# EAGLE board seamonster_smd_draft1 (EAGLE 8.2.1)

Size 172.5 x 106.5 mm. Coordinates in mm from the lower left corner, seen from the top.
Outline: 0,0 172.5,0 172.5,106.5 0,106.5 0,0
Copper layers (1*16): Top 0.035mm / dielectric 1.5mm / Bottom 0.035mm
Design rules "default": minimum track width 6mil, minimum drill 0.35mm, track to track 6mil, track to pad 6mil, pad to pad 6mil, via to via 6mil, smd to smd 6mil, copper to edge 40mil, drill to drill 6mil, minimum pad ring 10mil, minimum via ring 8mil, stop-mask expansion 4mil, vias tented up to drill 0mil, thermal gap 10mil

## Footprints (pad centres in the part's own frame; a part is rotated, then mirrored left to right if it is on the bottom)
WQP-PJ301M-12_JACK = drill 1.1: P$1_TIP 0,5; P$2_SWITCH 0,-3.5; P$3_SLEEVE 0,-6.5
CPOL-RADIAL-10UF-25V = drill 0.7 pad 1.651 square: 1 1.27,0 | drill 0.7 pad 1.651: 2 -1.27,0
0805 = smd 0.8 x 1.2: 1 -0.9,0; 2 0.9,0
TO220H = drill 1.118 long: 1 -2.54,-10.16; 2 0,-10.16; 3 2.54,-10.16 | hole 3.302: 0,4.826
SO16 = smd 0.66 x 2.032: 1 -4.445,-3.073; 2 -3.175,-3.073; 3 -1.905,-3.073; 4 -0.635,-3.073; 5 0.635,-3.073; 6 1.905,-3.073; 7 3.175,-3.073; 8 4.445,-3.073; 9 4.445,3.073; 10 3.175,3.073; 11 1.905,3.073; 12 0.635,3.073; 13 -0.635,3.073; 14 -1.905,3.073; 15 -3.175,3.073; 16 -4.445,3.073
SO14 = smd 0.66 x 2.032: 1 -3.81,-3.073; 2 -2.54,-3.073; 3 -1.27,-3.073; 4 0,-3.073; 5 1.27,-3.073; 6 2.54,-3.073; 7 3.81,-3.073; 8 3.81,3.073; 9 2.54,3.073; 10 1.27,3.073; 11 0,3.073; 12 -1.27,3.073; 13 -2.54,3.073; 14 -3.81,3.073
LED3MM = drill 0.813 pad 1.88: A -1.27,0; K 1.27,0
SO14' = smd 0.6 x 2.2: 1 -3.81,-2.6; 2 -2.54,-2.6; 3 -1.27,-2.6; 4 0,-2.6; 5 1.27,-2.6; 6 2.54,-2.6; 7 3.81,-2.6; 8 3.81,2.6; 9 2.54,2.6; 10 1.27,2.6; 11 0,2.6; 12 -1.27,2.6; 13 -2.54,2.6; 14 -3.81,2.6
COMBO_POWER = drill 1.016 pad 1.93: +5V-DOTCOM 1.27,-3.493; COM-DOTCOM -1.27,-3.493; KEY-DOTCOM 3.81,-3.493; NA-DOTCOM -6.35,-3.493; V+DOTCOM 6.35,-3.493; V-DOTCOM -3.81,-3.493 | drill 1.016 pad 1.88 octagon: COM-EURO1 -2.54,-1.27; COM-EURO2 -2.54,1.27; COM-EURO3 0,-1.27; COM-EURO4 0,1.27; COM-EURO5 2.54,-1.27; COM-EURO6 2.54,1.27; V+EURO1 5.08,-1.27; V+EURO2 5.08,1.27; V-EURO1 -5.08,-1.27; V-EURO2 -5.08,1.27 | drill 1.7 pad 2.54: COM-MOTM1 1.98,3.493; COM_MOTM2 -1.98,3.493; V+MOTM 5.94,3.493; V-MOTM -5.94,3.493
M9040P = drill 2.2: 1 0,4.699 | drill 2.2 pad 3: 2 0,0; 3 0,-4.699
9MM_SNAP-IN_POT = drill 1.1 square: 1 -2.5,-7 | drill 1.1 octagon: 2 0,-7; 3 2.5,-7 | drill 2.1 square: CHASSIS1 -4.5,0; CHASSIS2 4.5,0

## Placement (x,y rotation side)
A  THONKICONNNEW  [WQP-PJ301M-12_JACK]  -57.15,-3.38 180 top  (outside the outline)
B  THONKICONNNEW  [WQP-PJ301M-12_JACK]  -68.58,-3.38 180 top  (outside the outline)
C  THONKICONNNEW  [WQP-PJ301M-12_JACK]  -80.01,-3.38 180 top  (outside the outline)
C1  47µF  [CPOL-RADIAL-10UF-25V]  -78.74,72.82 0 top  (outside the outline)
C2  47µF  [CPOL-RADIAL-10UF-25V]  -85.09,72.82 0 top  (outside the outline)
C3  0.1µF  [0805]  -15.24,88.06 0 top  (outside the outline)
C4  0.1µF  [0805]  -19.05,88.06 0 top  (outside the outline)
C5  0.1µF  [0805]  -22.86,88.06 0 top  (outside the outline)
C6  0.1µF  [0805]  -26.67,88.06 0 top  (outside the outline)
CCO1_OUT  THONKICONNNEW  [WQP-PJ301M-12_JACK]  7.62,9.32 180 top
CCO2_OUT  THONKICONNNEW  [WQP-PJ301M-12_JACK]  17.78,9.32 180 top
CCO3_OUT  THONKICONNNEW  [WQP-PJ301M-12_JACK]  27.94,9.32 180 top
CCO4_OUT  THONKICONNNEW  [WQP-PJ301M-12_JACK]  38.1,9.32 180 top
COMPLEX_OUT1  THONKICONNNEW  [WQP-PJ301M-12_JACK]  68.58,9.32 180 top
COMPLEX_OUT2  THONKICONNNEW  [WQP-PJ301M-12_JACK]  78.74,9.32 180 top
IC1  7805T  [TO220H]  -21.59,1.7 0 top  (outside the outline)
IC2  4051D  [SO16]  -30.48,72.82 0 top  (outside the outline)
IC3  4051D  [SO16]  -43.18,72.82 0 top  (outside the outline)
IC4  DG408DY  [SO16]  -55.88,72.82 0 top  (outside the outline)
IC5  4040D  [SO16]  -68.58,72.82 0 top  (outside the outline)
IC6  40106D  [SO14]  -100.33,-11 0 top  (outside the outline)
IC7  4070D  [SO14]  -111.76,-11 0 top  (outside the outline)
LED1  [LED3MM]  10.16,82.98 0 top
LED2  [LED3MM]  29.21,82.98 0 top
LED3  [LED3MM]  48.26,82.98 0 top
LED4  [LED3MM]  67.31,82.98 0 top
LED5  [LED3MM]  86.36,82.98 0 top
LED6  [LED3MM]  105.41,82.98 0 top
LED7  [LED3MM]  124.46,82.98 0 top
LED8  [LED3MM]  143.51,82.98 0 top
LED9  [LED3MM]  -207.01,-27.51 0 top  (outside the outline)
LED10  [LED3MM]  -207.01,-46.56 0 top  (outside the outline)
LED11  [LED3MM]  -207.01,-65.61 0 top  (outside the outline)
LED12  [LED3MM]  -207.01,-84.66 0 top  (outside the outline)
LED13  [LED3MM]  -207.01,-103.71 0 top  (outside the outline)
LED14  [LED3MM]  -207.01,-122.76 0 top  (outside the outline)
MUX1  THONKICONNNEW  [WQP-PJ301M-12_JACK]  10.16,69.01 0 top
MUX2  THONKICONNNEW  [WQP-PJ301M-12_JACK]  29.21,69.01 0 top
MUX3  THONKICONNNEW  [WQP-PJ301M-12_JACK]  48.26,69.01 0 top
MUX4  THONKICONNNEW  [WQP-PJ301M-12_JACK]  67.31,69.01 0 top
MUX5  THONKICONNNEW  [WQP-PJ301M-12_JACK]  86.36,69.01 0 top
MUX6  THONKICONNNEW  [WQP-PJ301M-12_JACK]  105.41,69.01 0 top
MUX7  THONKICONNNEW  [WQP-PJ301M-12_JACK]  124.46,69.01 0 top
MUX8  THONKICONNNEW  [WQP-PJ301M-12_JACK]  143.51,69.01 0 top
MUX_OUT  THONKICONNNEW  [WQP-PJ301M-12_JACK]  -74.93,32.18 0 top  (outside the outline)
Q1  THONKICONNNEW  [WQP-PJ301M-12_JACK]  -127,-2.11 0 top  (outside the outline)
Q2  THONKICONNNEW  [WQP-PJ301M-12_JACK]  -143.51,-2.11 0 top  (outside the outline)
Q3  THONKICONNNEW  [WQP-PJ301M-12_JACK]  -160.02,-2.11 0 top  (outside the outline)
Q4  THONKICONNNEW  [WQP-PJ301M-12_JACK]  -176.53,-2.11 0 top  (outside the outline)
Q5  THONKICONNNEW  [WQP-PJ301M-12_JACK]  -193.04,-2.11 0 top  (outside the outline)
Q6  THONKICONNNEW  [WQP-PJ301M-12_JACK]  -209.55,-2.11 0 top  (outside the outline)
R1  [0805]  8.89,79.17 90 top
R2  [0805]  27.94,79.17 90 top
R3  [0805]  46.99,79.17 90 top
R4  [0805]  66.04,79.17 90 top
R5  [0805]  85.09,79.17 90 top
R6  [0805]  104.14,79.17 90 top
R7  [0805]  123.19,79.17 90 top
R8  [0805]  142.24,79.17 90 top
R9  [0805]  -219.71,-129.11 0 top  (outside the outline)
R10  [0805]  -223.52,-129.11 0 top  (outside the outline)
R11  [0805]  -227.33,-129.11 0 top  (outside the outline)
R12  [0805]  -231.14,-129.11 0 top  (outside the outline)
R13  [0805]  -234.95,-129.11 0 top  (outside the outline)
R14  [0805]  -238.76,-129.11 0 top  (outside the outline)
U1  TL074_SMD  [SO14']  -83.82,57.58 0 top  (outside the outline)
U2  TL074_SMD  [SO14']  -19.05,72.82 0 top  (outside the outline)
U$1  COMBO_POWER  [COMBO_POWER]  -60.96,58.85 0 top  (outside the outline)
U$2  T-80-T-SPDT-ON-OFF-ON  [M9040P]  -256.54,-111.33 0 top  (outside the outline)
U$3  T-80-T-SPDT-ON-OFF-ON  [M9040P]  -289.56,-111.33 0 top  (outside the outline)
U$4  T-80-T-SPDT-ON-OFF-ON  [M9040P]  -322.58,-111.33 0 top  (outside the outline)
U$5  T-80-T-SPDT-ON-OFF-ON  [M9040P]  -355.6,-111.33 0 top  (outside the outline)
VCO1_OUT  THONKICONNNEW  [WQP-PJ301M-12_JACK]  48.26,9.32 180 top
VCO2_OUT  THONKICONNNEW  [WQP-PJ301M-12_JACK]  58.42,9.32 180 top
VR1  [9MM_SNAP-IN_POT]  10.16,95.68 180 top
VR2  [9MM_SNAP-IN_POT]  29.21,95.68 180 top
VR3  [9MM_SNAP-IN_POT]  48.26,95.68 180 top
VR4  [9MM_SNAP-IN_POT]  67.31,95.68 180 top
VR5  [9MM_SNAP-IN_POT]  86.36,95.68 180 top
VR6  [9MM_SNAP-IN_POT]  105.41,95.68 180 top
VR7  [9MM_SNAP-IN_POT]  124.46,95.68 180 top
VR8  [9MM_SNAP-IN_POT]  143.51,95.68 180 top
VR9  100KΩ  [9MM_SNAP-IN_POT]  -350.52,-148.16 0 top  (outside the outline)
VR10  [9MM_SNAP-IN_POT]  -350.52,-179.91 0 top  (outside the outline)
VR11  [9MM_SNAP-IN_POT]  -350.52,-211.66 0 top  (outside the outline)
VR12  [9MM_SNAP-IN_POT]  -350.52,-243.41 0 top  (outside the outline)

## Library data of the parts
A B C CCO1_OUT CCO2_OUT CCO3_OUT CCO4_OUT COMPLEX_OUT1 COMPLEX_OUT2 MUX1-MUX8 MUX_OUT Q1-Q6 U1 U2 U$2-U$5 VCO1_OUT VCO2_OUT VR1-VR12 = MusicThingModular
C1-C6 = SparkFun-Capacitors
IC1 = linear
IC2 IC3 IC5-IC7 = 40xx
IC4 = maxim; MPN: DG408DY+T; OC_FARNELL: 1077070; OC_NEWARK: 67K3719
LED1-LED14 = SparkFun-LED
R1-R14 = SparkFun-Resistors
U$1 = combo_power

## Nets
A: A.P$1_TIP IC2.11 IC3.11 IC4.1
B: B.P$1_TIP IC2.10 IC3.10 IC4.16
C: C.P$1_TIP IC2.9 IC3.9 IC4.15
CCO1: IC6.4 VR9.2
CV_OUT: IC3.3
GND: A.P$3_SLEEVE B.P$3_SLEEVE C1.2 C2.1 C3.2 C4.2 C5.2 C6.2 C.P$3_SLEEVE CCO1_OUT.P$3_SLEEVE CCO2_OUT.P$3_SLEEVE CCO3_OUT.P$3_SLEEVE CCO4_OUT.P$3_SLEEVE COMPLEX_OUT1.P$3_SLEEVE COMPLEX_OUT2.P$3_SLEEVE IC1.2 IC2.6 IC2.7 IC2.8 IC3.6 IC3.7 IC3.8 IC4.14 LED1.K LED2.K LED3.K LED4.K LED5.K LED6.K LED7.K LED8.K LED9.K LED10.K LED11.K LED12.K LED13.K LED14.K MUX1.P$3_SLEEVE MUX2.P$3_SLEEVE MUX3.P$3_SLEEVE MUX4.P$3_SLEEVE MUX5.P$3_SLEEVE MUX6.P$3_SLEEVE MUX7.P$3_SLEEVE MUX8.P$3_SLEEVE MUX_OUT.P$3_SLEEVE Q1.P$3_SLEEVE Q2.P$3_SLEEVE Q3.P$3_SLEEVE Q4.P$3_SLEEVE Q5.P$3_SLEEVE Q6.P$3_SLEEVE U$1.COM-DOTCOM U$1.COM-EURO1 U$1.COM-EURO2 U$1.COM-EURO3 U$1.COM-EURO4 U$1.COM-EURO5 U$1.COM-EURO6 U$1.COM-MOTM1 U$1.COM_MOTM2 VCO1_OUT.P$3_SLEEVE VCO2_OUT.P$3_SLEEVE VR1.1 VR2.1 VR3.1 VR4.1 VR5.1 VR6.1 VR7.1 VR8.1
N$1: IC4.8 MUX_OUT.P$1_TIP
N$2: IC4.4 MUX1.P$1_TIP
N$3: IC4.5 MUX2.P$1_TIP
N$4: IC4.6 MUX3.P$1_TIP
N$5: IC4.7 MUX4.P$1_TIP
N$6: IC4.12 MUX5.P$1_TIP
N$7: IC4.11 MUX6.P$1_TIP
N$8: IC4.10 MUX7.P$1_TIP
N$9: IC4.9 MUX8.P$1_TIP
N$10: LED1.A R1.2
N$11: LED2.A R2.2
N$12: LED3.A R3.2
N$13: LED4.A R4.2
N$14: LED5.A R5.2
N$15: LED6.A R6.2
N$16: LED7.A R7.2
N$17: LED8.A R8.2
N$18: IC3.13 VR1.2
N$19: IC2.13 R1.1
N$20: IC2.14 R2.1
N$21: IC2.15 R3.1
N$22: IC2.12 R4.1
N$23: IC2.1 R5.1
N$24: IC2.5 R6.1
N$25: IC2.2 R7.1
N$26: IC2.4 R8.1
N$27: IC3.14 VR2.2
N$28: IC3.15 VR3.2
N$29: IC3.12 VR4.2
N$30: IC3.1 VR5.2
N$31: IC3.5 VR6.2
N$32: IC3.2 VR7.2
N$33: IC3.4 VR8.2
N$34: LED9.A R9.1
N$35: LED10.A R10.1
N$36: LED11.A R11.1
N$37: LED12.A R12.1
N$38: LED13.A R13.1
N$39: LED14.A R14.1
N$40: IC5.9 Q1.P$1_TIP R9.2
N$41: IC5.7 Q2.P$1_TIP R10.2
N$42: IC5.6 Q3.P$1_TIP
N$43: IC5.5 Q4.P$1_TIP
N$44: IC5.3 Q5.P$1_TIP
N$45: IC5.2 Q6.P$1_TIP
N$46: IC6.3 U$2.2 VR9.1
N$47: CCO1_OUT.P$1_TIP U1.1 U1.2
N$48: R11.2
N$49: R12.2
N$50: R13.2
N$51: R14.2
N$52: CCO2_OUT.P$1_TIP U1.6 U1.7
N$53: CCO3_OUT.P$1_TIP U1.8 U1.9
N$54: CCO4_OUT.P$1_TIP U1.13 U1.14
N$55: U1.3
N$56: U1.5
N$57: U1.10
N$58: U1.12
N$59: U2.1 U2.2 VCO1_OUT.P$1_TIP
N$60: U2.6 U2.7 VCO2_OUT.P$1_TIP
N$61: COMPLEX_OUT1.P$1_TIP U2.8 U2.9
N$63: COMPLEX_OUT2.P$1_TIP U2.13 U2.14
N$67: U2.3
N$68: U2.5
N$69: U2.10
N$70: U2.12
V+: C1.1 C3.1 IC1.1 IC4.13 U1.4 U2.4 U$1.V+DOTCOM U$1.V+EURO1 U$1.V+EURO2 U$1.V+MOTM
V-: C2.2 IC4.3 U1.11 U2.11 U$1.V-DOTCOM U$1.V-EURO1 U$1.V-EURO2 U$1.V-MOTM
VCC: C4.1 C5.1 C6.1 IC1.3 IC2.3 IC2.16 IC3.16 VR1.3 VR2.3 VR3.3 VR4.3 VR5.3 VR6.3 VR7.3 VR8.3
VDD: IC5.16 IC6.14 IC7.14
VSS: IC5.8 IC6.7 IC7.7

## Tracks (layer width: path | path; a pad name or v marks a point on that pad's centre or on a via)
A  (3 unrouted)
B  (3 unrouted)
C  (3 unrouted)
CCO1  (1 unrouted)
GND  (70 unrouted)
N$1  (1 unrouted)
N$2  (1 unrouted)
N$3  (1 unrouted)
N$4  (1 unrouted)
N$5  (1 unrouted)
N$6  (1 unrouted)
N$7  (1 unrouted)
N$8  (1 unrouted)
N$9  (1 unrouted)
N$10  (1 unrouted)
N$11  (1 unrouted)
N$12  (1 unrouted)
N$13  (1 unrouted)
N$14  (1 unrouted)
N$15  (1 unrouted)
N$16  (1 unrouted)
N$17  (1 unrouted)
N$18  (1 unrouted)
N$19  (1 unrouted)
N$20  (1 unrouted)
N$21  (1 unrouted)
N$22  (1 unrouted)
N$23  (1 unrouted)
N$24  (1 unrouted)
N$25  (1 unrouted)
N$26  (1 unrouted)
N$27  (1 unrouted)
N$28  (1 unrouted)
N$29  (1 unrouted)
N$30  (1 unrouted)
N$31  (1 unrouted)
N$32  (1 unrouted)
N$33  (1 unrouted)
N$34  (1 unrouted)
N$35  (1 unrouted)
N$36  (1 unrouted)
N$37  (1 unrouted)
N$38  (1 unrouted)
N$39  (1 unrouted)
N$40  (2 unrouted)
N$41  (2 unrouted)
N$42  (1 unrouted)
N$43  (1 unrouted)
N$44  (1 unrouted)
N$45  (1 unrouted)
N$46  (2 unrouted)
N$47  (2 unrouted)
N$52  (2 unrouted)
N$53  (2 unrouted)
N$54  (2 unrouted)
N$59  (2 unrouted)
N$60  (2 unrouted)
N$61  (2 unrouted)
N$63  (2 unrouted)
V+  (9 unrouted)
V-  (7 unrouted)
VCC  (14 unrouted)
VDD  (2 unrouted)
VSS  (2 unrouted)